# Altium PCB Cpt_Temp.PcbDoc
Units mil, origin at the board's own origin, x right, y up, seen from the top; angles counter-clockwise.
Board outline 6000 x 4000 mil, 2 copper layers (Top Layer, Bottom Layer); 10 components, 8 nets, 29 pads, 5 vias.
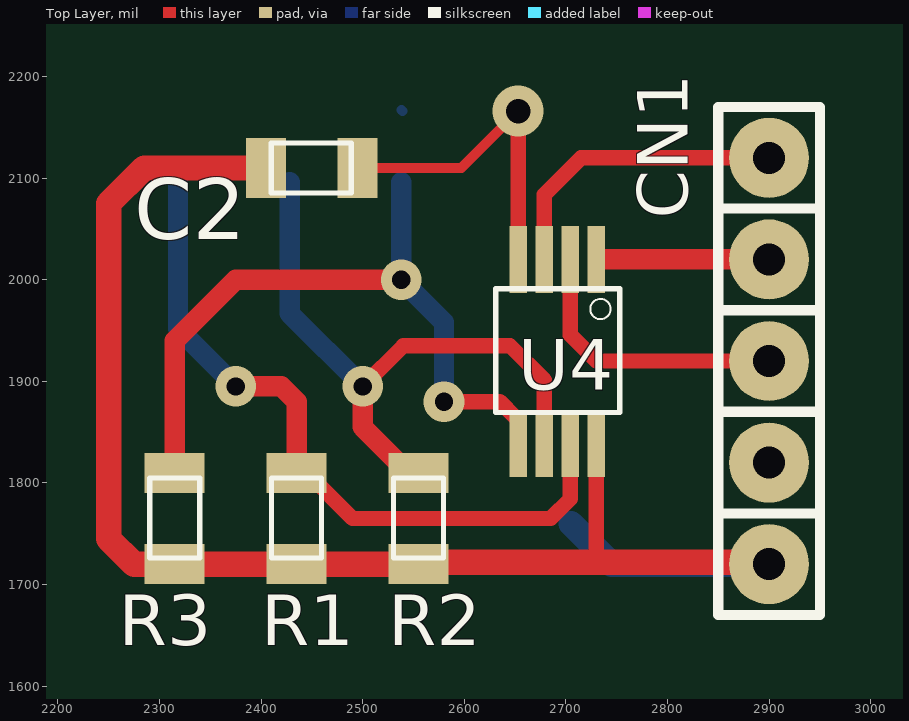
[diagram p0: Top Layer view]
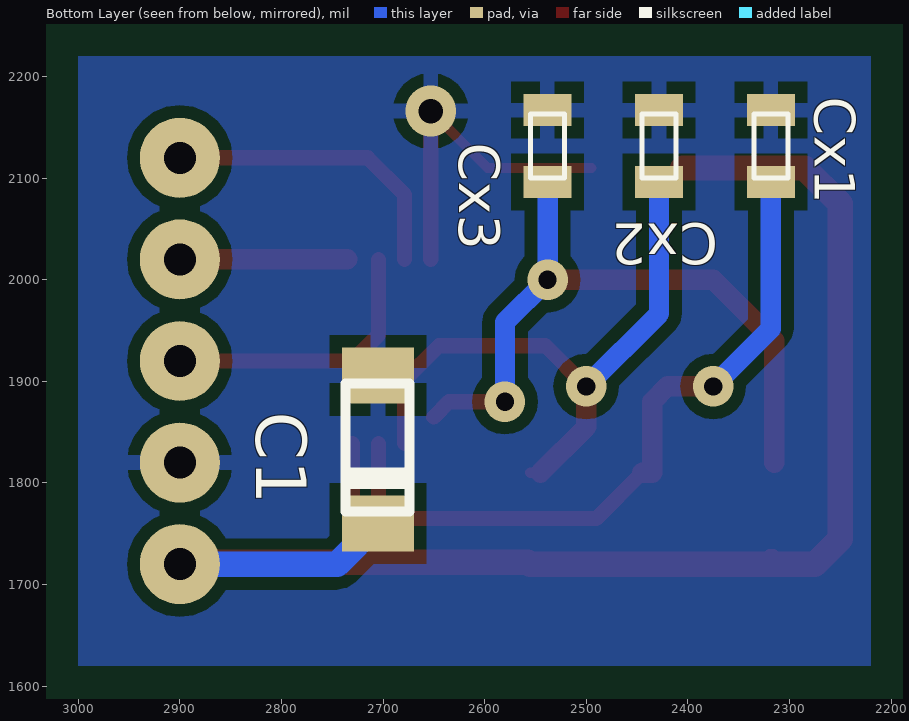
[diagram p1: Bottom Layer view, seen from below]

## Layer stack, top to bottom
Top Layer: signal copper 1.4
Dielectric: dielectric 12.6, FR-4, Dk 4.8
Bottom Layer: signal copper 1.4

## Board outline
1000,1000 7000,1000 7000,5000 1000,5000

## Design rules (kind name [scope] priority, off if disabled: settings)
AssemblyTestPointUsage [All] p1 off:
AssemblyTestpoint [All] p1 off: testpointundercomponent=TRUE minsize=40 maxsize=100 preferedsize=60 minholesize=0 maxholesize=40 preferedholesize=32 testpointgrid=1 usegrid=TRUE gridtolerance=0.01 allowsidetop=TRUE allowsidebottom=TRUE
Clearance [All] p1 off: gap=12
ComponentClearance [All] p1 off: gap=10 collisioncheckmode=3 verticalgap=10 showdistances=FALSE
PolygonConnect [All] p1: connectstyle=Relief reliefconductorwidth=15 reliefentries=4 polygonreliefangle="90 Angle"
RoomDefinition Cpt_Temp [InComponentClass('Cpt_Temp')] p1: confinementstyle=ConfineIn formatcopy=TRUE lockcomponents=FALSE outline 2170,1565 3095,1565 3095,2275 2170,2275
RoutingCorners [All] p1 off: cornerstyle=45-Degree minsetback=100 maxsetback=100
RoutingLayers [All] p1 off: top layer_v5=TRUE bottom layer_v5=TRUE
RoutingPriority [All] p1 off: routingpriority=0
RoutingTopology [All] p1 off: topology=Shortest
RoutingVias [All] p1 off: holewidth=28 width=50 viastyle="Through Hole" minholewidth=28 minwidth=50 maxholewidth=28 maxwidth=50
SilkToSilkClearance [All] p1 off: silktosilkclearance=10
SilkscreenOverComponentPads [All] p1 off: minsilkscreentomaskgap=10
SolderMaskExpansion [All] p1: expansion=4
Width [All] p1: maxlimit=60 minlimit=10 preferedwidth=10
19 further rules are at their usual default settings.

## Components (designator, comment, footprint, x,y, rotation, side; value= is the part's Value field where it differs from the comment)
C1 "1µF/16V" 3216-18 2705,1760 r90 bottom
C2 "47n" 0805 2405,2110 r0 top
CN1 "inch_ligne 1x5" INCH_1x5_droit 2900,1720 r90 top
Cx1 "PONT" 0603 2335,2100 r90 bottom
Cx2 "PONT" 0603 2445,2100 r90 bottom
Cx3 "PONT" 0603 2555,2100 r90 bottom
R1 "10K" 0805 2435,1810 r270 top
R2 "10K" 0805 2555,1810 r270 top
R3 "10K" 0805 2315,1810 r270 top
U4 "MCP9808" MSOP-08 2730,2020 r270 top

## Footprints (in the part's own frame and the unit in brackets; to place one, negate y for a bottom-side part, rotate by r counter-clockwise, add the part's x,y. Pads: shape width x height; smd on the part's side, far side on the other; paste and mask are expansions set on the pad)
0603 [mm] "résistance CMS"
  rect 0.8x1.2 smd: 1(-0.1,-0.425) 2(1.7,-0.425)
  silkscreen extent 0,-0.85 1.6,0
0805 [mm] "résistance CMS"
  rect 1x1.5 smd: 1(0,0) 2(2.286,0)
  silkscreen extent 0.13,-0.63 2.13,0.63
3216-18 [mm] "condensateur tantale CMS (3,2 x 1,6 x 1,6)"
  rect 1.4x1.8 smd: 1(0,0) 2(3.7,0)
  silkscreen extent 0.3,-0.79 3.5,0.81
INCH_1x5_droit [mm] "simple rangée 2,54 mm"
  round 2 hole 0.8: 1(0,0) 2(2.54,0) 3(5.08,0) 4(7.62,0) 5(10.16,0)
  silkscreen extent -1.27,-1.27 11.43,1.27
MSOP-08 [mil] "boîtier DGK"
  rect 66x17 smd: 1(0,0) 2(0,-25.59) 3(0,-51.18) 4(0,-76.77) 5(181.1,-76.77) 6(181.1,-51.18) 7(181.1,-25.59) 8(181.1,0)
  silkscreen extent 29,-99 151,23

## Part data
C1: library part "tantale 1µF/16V", "145-7406 case 3216-18"
C2: library part Cap_CMS_0805, "CMS 0805"
CN1: library part Inch_1x5_droit, "Inch_1x5_droit"
Cx1 Cx2 Cx3: library part "Pont 0603", "Pont pour configuration I2C"
R1 R2 R3: library part "Res CMS 0805", "CMS 0805"
U4: "Digital temperature Sensor"

## Via types
v1: diameter 40, hole 18, Top Layer to Bottom Layer, 4 vias
v2: diameter 50, hole 24, Top Layer to Bottom Layer, 1 vias

## Nets (pads, with @x,y where several pads share a name; then routed paths per layer and width w, separated by ;. In a path a pad name is that pad's centre, name@x,y a point inside that pad or via, vN(x,y) a via of type N, cw(c..) or ccw(c..) an arc to the next point about the centre after c; other vN are vias at no path point)
3V3: C1.1 C2.1 CN1.1 R1.2 R2.2 R3.2 U4.8 | length 1485
  Top Layer w10: R3.2@2315,1730 R3.2@2320,1730
  Top Layer w15: 2730,1732 U4.8
  Top Layer w20: R2.2 R2.2@2557,1722 ; CN1.1@2898,1722 CN1.1
  Top Layer w25: C2.1 2285,2110 2250,2075 2250,1745 2275,1720 R3.2 R1.2 R2.2 ; R2.2@2557,1722 CN1.1@2898,1722
  Bottom Layer w25: C1.1 2745,1720 CN1.1
A0: Cx1.1 R1.1 U4.7 | length 711.4
  Top Layer w15: R1.1@2445,1810 2490,1765 2685,1765 2704.41,1784.41 U4.7
  Top Layer w20: v1(2375,1895) 2420,1895 2435,1880 R1.1 R1.1@2445,1810
  Bottom Layer w20: Cx1.1 2318.27,1951.73 v1(2375,1895)
A1: Cx2.1 R2.1 U4.6 | length 616.1
  Top Layer w10: R2.1@2545,1810 R2.1
  Top Layer w15: v1(2500,1895) 2540,1935 2645,1935 2678.82,1901.18 U4.6
  Top Layer w20: v1(2500,1895) 2500,1855 R2.1@2545,1810
  Bottom Layer w20: Cx2.1 2428.27,1966.73 v1(2500,1895)
A2: Cx3.1 R3.1 U4.5 | length 679.1
  Top Layer w15: v1(2580,1880) 2635,1880 U4.5@2650,1865
  Top Layer w20: R3.1@2315,1820 2315,1940 2375,2000 v1(2538,2000)
  Bottom Layer w10: Cx3.1 Cx3.1@2539.33,2095
  Bottom Layer w20: Cx3.1 2538,2095.8 v1(2538,2000) 2580,1958 v1(2580,1880)
GND: C1.2 C2.2 CN1.2 Cx1.2 Cx2.2 Cx3.2 U4.4 | length 328.6
  Top Layer w10: C2.2 2597,2110 v2(2653,2166) ; U4.4@2653,2020.23 U4.4
  Top Layer w15: U4.4@2653,2020.23 v2(2653,2166)
  Bottom Layer w10: Cx3.2 Cx3.2@2539.2,2166
INT: CN1.5 U4.3 | length 300
  Top Layer w15: U4.3 2678.82,2083.82 2715,2120 CN1.5
SCL: CN1.3 U4.2 | length 280.6
  Top Layer w15: U4.2 2704.41,1945.59 2730,1920 CN1.3
SDA: CN1.4 U4.1 | length 165
  Top Layer w20: U4.1@2735,2020 CN1.4

## Polygon pours and split planes (outlines as drawn)
GND on Bottom Layer "Bottom Layer-No Net" (solid, pour order 1000): 2220,2220 3000,2220 3000,1620 2220,1620 2220,2220

## Silkscreen, mask and mechanical layers (free items; w line width, h text height)
Mechanical 1:
  lines w10: 2220,1620 2220,2220 3000,2220 3000,1620 2220,1620